# EAGLE board ESLv2 (EAGLE 9.6.2)
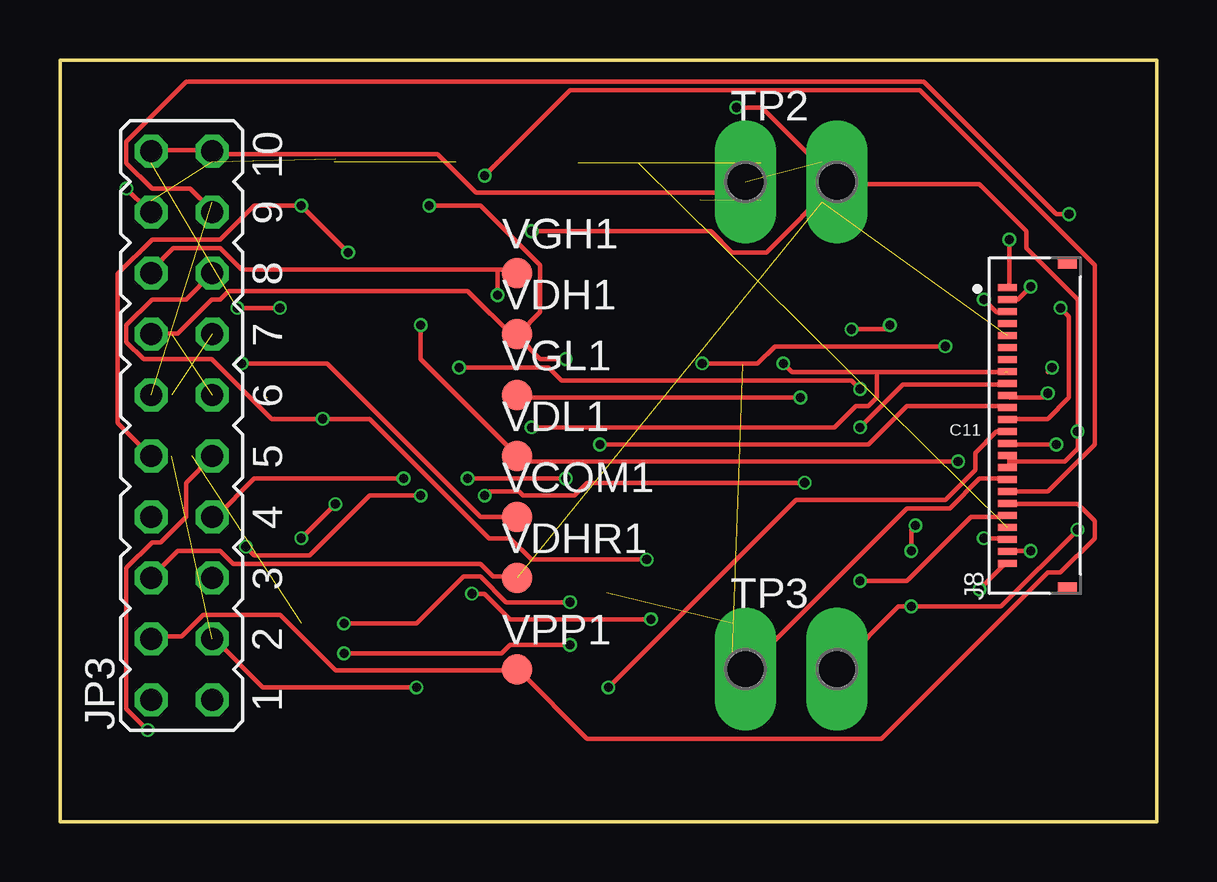
[diagram p0: board, top side]
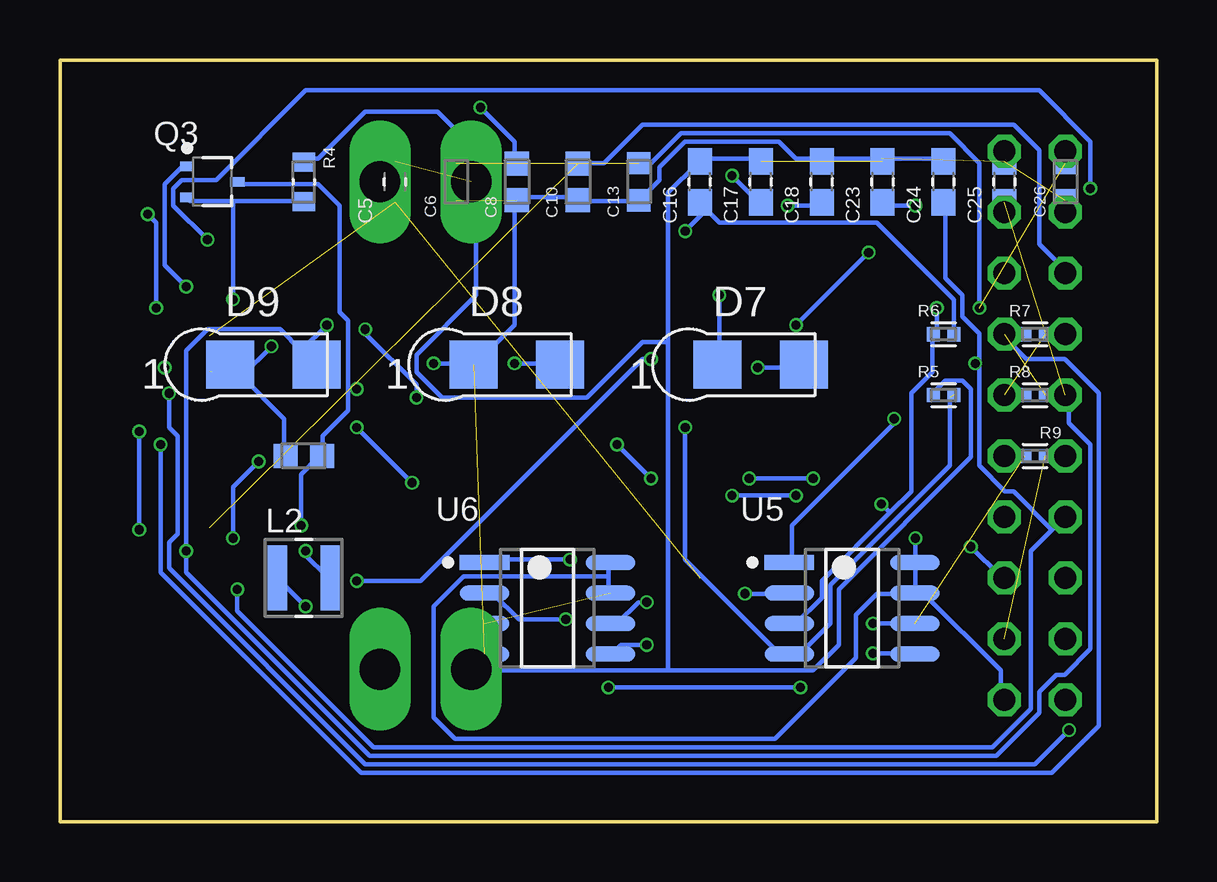
[diagram p1: board, bottom side, seen from below]

Size 45.72 x 31.75 mm. Coordinates in mm from the lower left corner, seen from the top.
Outline: 0,0 0,31.75 45.72,31.75 45.72,0 0,0
Copper layers (1*16): Top 0.035mm / dielectric 1.5mm / Bottom 0.035mm
Design rules "EagleRules-2-Layer-Shep-C": minimum track width 6mil, minimum drill 0.3mm, track to track 6mil, track to pad 6mil, pad to pad 6mil, via to via 6mil, smd to smd 0mil, copper to edge 10mil, drill to drill 10mil, minimum pad ring 2mil, minimum via ring 2mil, stop-mask expansion 2mil, vias tented up to drill 100mil, thermal gap 10mil
Net classes: 1 power: width 0.203 mm

## Footprints (pad centres in the part's own frame; a part is rotated, then mirrored left to right if it is on the bottom)
CAPC1608X90 = smd 1.1 x 1: 1 -0.85,0; 2 0.85,0
CAPC1608X90N = smd 0.92 x 0.98: 1 -0.775,0; 2 0.775,0
CAPC1608X100N = smd 1 x 1.02: 1 -0.759,0; 2 0.759,0
SOD-123FL = smd 2 x 2: 1 -1.8,0; 2 1.8,0
FPC-CONNECTOR-24PIN_HRS_FH34SRJ-24S-0.5SH(99) = smd 0.3 x 0.8: 1 5.75,1.15; 2 5.25,1.15; 3 4.75,1.15; 4 4.25,1.15; 5 3.75,1.15; 6 3.25,1.15; 7 2.75,1.15; 8 2.25,1.15; 9 1.75,1.15; 10 1.25,1.15; 11 0.75,1.15; 12 0.25,1.15; 13 -0.25,1.15; 14 -0.75,1.15; 15 -1.25,1.15; 16 -1.75,1.15; 17 -2.25,1.15; 18 -2.75,1.15; 19 -3.25,1.15; 20 -3.75,1.15; 21 -4.25,1.15; 22 -4.75,1.15; 23 -5.25,1.15; 24 -5.75,1.15 | smd 0.4 x 0.8: S1 -6.75,-1.35; S2 6.75,-1.35
JP10Q = drill 0.914 octagon: 1 -11.43,-1.27; 2 -11.43,1.27; 3 -8.89,-1.27; 4 -8.89,1.27; 5 -6.35,-1.27; 6 -6.35,1.27; 7 -3.81,-1.27; 8 -3.81,1.27; 9 -1.27,-1.27; 10 -1.27,1.27; 11 1.27,-1.27; 12 1.27,1.27; 13 3.81,-1.27; 14 3.81,1.27; 15 6.35,-1.27; 16 6.35,1.27; 17 8.89,-1.27; 18 8.89,1.27; 19 11.43,-1.27; 20 11.43,1.27
MURATA_LQH3NPZ100MMEL_0 = smd 0.8 x 2.7: 1 -1.1,0; 2 1.1,0
ON_SEMICONDUCTOR_MCH3478-TL-H_0 = smd 0.6 x 0.4: 1 -1.05,0.65; 2 -1.05,-0.65; 3 1.05,0
RESC1608X55N = smd 0.79 x 0.93: 1 -0.82,0; 2 0.82,0
RESC1005X40 = smd 0.54 x 0.6: 1 -0.43,0; 2 0.43,0
P2-38-17 = drill 1.702 pad 2.121 long: TP-1 -1.905,0; TP-2 1.905,0
MACRONIX_MX25V8006EM1I-13G_0 = smd 2.065 x 0.626: 1 -2.621,1.905; 2 -2.621,0.635; 3 -2.621,-0.635; 4 -2.621,-1.905; 5 2.621,-1.905; 6 2.621,-0.635; 7 2.621,0.635; 8 2.621,1.905
B1,27 = smd 1.27 x 1.27: TP 0,0

## Placement (x,y rotation side)
C5  CC0603ZRY5V8BB105  [CAPC1608X90]  31.75,26.67 90 bottom
C6  06033G104ZAT2A  [CAPC1608X90N]  29.21,26.67 90 bottom
C8  GRM188C81E475KE11D  [CAPC1608X100N]  26.67,26.67 90 bottom
C10  GRM188C81E475KE11D  [CAPC1608X100N]  24.13,26.67 90 bottom
C11  GRM188C81E475KE11D  [CAPC1608X100N]  35.56,15.24 0 bottom
C13  06033G104ZAT2A  [CAPC1608X90N]  21.59,26.67 90 bottom
C16  CC0603ZRY5V8BB105  [CAPC1608X90]  19.05,26.67 90 bottom
C17  CC0603ZRY5V8BB105  [CAPC1608X90]  16.51,26.67 90 bottom
C18  CC0603ZRY5V8BB105  [CAPC1608X90]  13.97,26.67 90 bottom
C23  CC0603ZRY5V8BB105  [CAPC1608X90]  11.43,26.67 90 bottom
C24  CC0603ZRY5V8BB105  [CAPC1608X90]  8.89,26.67 90 bottom
C25  CC0603ZRY5V8BB105  [CAPC1608X90]  6.35,26.67 90 bottom
C26  06033G104ZAT2A  [CAPC1608X90N]  3.81,26.67 90 bottom
D7  SS2040FL  [SOD-123FL]  16.51,19.05 0 bottom
D8  SS2040FL  [SOD-123FL]  26.67,19.05 0 bottom
D9  SS2040FL  [SOD-123FL]  36.83,19.05 0 bottom
J8  FPC-CONNECTOR-24PIN_FH34SRJ-24S-0.5SH(99)  [FPC-CONNECTOR-24PIN_HRS_FH34SRJ-24S-0.5SH(99)]  40.64,16.51 90 top
JP3  [JP10Q]  5.08,16.51 90 top
L2  MURATA_LQH3NPZ100MMELMURATA_LQH3NPZ100MMEL_0_0  [MURATA_LQH3NPZ100MMEL_0]  35.56,10.16 0 bottom
Q3  ON_SEMICONDUCTOR_MCH3478-TL-HON_SEMICONDUCTOR_MCH3478-TL-H_0_0  [ON_SEMICONDUCTOR_MCH3478-TL-H_0]  39.37,26.67 0 bottom
R4  RL0603FR-070R47L  [RESC1608X55N]  35.56,26.67 270 bottom
R5  RMCF0402ZT0R00  [RESC1005X40]  8.89,17.78 0 bottom
R6  RMCF0402ZT0R00  [RESC1005X40]  8.89,20.32 0 bottom
R7  RMCF0402ZT0R00  [RESC1005X40]  5.08,20.32 0 bottom
R8  RMCF0402ZT0R00  [RESC1005X40]  5.08,17.78 0 bottom
R9  RMCF0402ZT0R00  [RESC1005X40]  5.08,15.24 0 bottom
TP2  PTR2  [P2-38-17]  30.48,26.67 0 top
TP3  PTR2  [P2-38-17]  30.48,6.35 0 top
U5  MACRONIX_MX25V8006EM1I-13GMACRONIX_MX25V8006EM1I-13G_0_0  [MACRONIX_MX25V8006EM1I-13G_0]  12.7,8.89 0 bottom
U6  MACRONIX_MX25V8006EM1I-13GMACRONIX_MX25V8006EM1I-13G_0_0  [MACRONIX_MX25V8006EM1I-13G_0]  25.4,8.89 0 bottom
VCOM1  TPB1,27  [B1,27]  19.05,12.7 0 top
VDH1  TPB1,27  [B1,27]  19.05,20.32 0 top
VDHR1  TPB1,27  [B1,27]  19.05,10.16 0 top
VDL1  TPB1,27  [B1,27]  19.05,15.24 0 top
VGH1  TPB1,27  [B1,27]  19.05,22.86 0 top
VGL1  TPB1,27  [B1,27]  19.05,17.78 0 top
VPP1  TPB1,27  [B1,27]  19.05,6.35 0 top

## Library data of the parts
C5 C16-C18 C23-C25 = CAP 1uF; DESCRIPTION: 1µF -20%, +80% 25V Ceramic Capacitor Y5V (F) 0603 (1608 Metric); DIGI-KEY_PART_NUMBER: 311-1829-1-ND; MF: Yageo; MP: CC0603ZRY5V8BB105; PACKAGE: 0603 Yageo; PURCHASE-URL: https://pricing.snapeda.com/search/part/CC0603ZRY5V8BB105/?ref=eda
C6 C13 C26 = CAP 100nF; DESCRIPTION: Cap Ceramic 0.1uF 25V Y5V -20% to 80% Pad SMD 0603 85°C T/R; MF: AVX; MP: 06033G104ZAT2A; PACKAGE: None; PURCHASE-URL: https://pricing.snapeda.com/search/part/06033G104ZAT2A/?ref=eda
C8 C10 C11 = CAP 4.7uF; AVAILABILITY: In Stock; DESCRIPTION: SMD Capacitor X6S(EIA) with Capacitance: 4.7uF Tol. 10%. Rated Voltage: 25Vdc; MF: Murata; MP: GRM188C81E475KE11D; PACKAGE: 1608 Murata; PRICE: None; PURCHASE-URL: https://pricing.snapeda.com/search/part/GRM188C81E475KE11D/?ref=eda
D7-D9 = DIODE; AVAILABILITY: In Stock; DESCRIPTION: Schottky Diodes & Rectifiers GP/TR/13/RoHS/10K/SOD-123FL/SKY/SOD/SSM-20AAFL/SSM20FL-QI02/PJ///; MF: Panjit; MP: SS2040FL; PACKAGE: None; PRICE: None; PURCHASE-URL: https://pricing.snapeda.com/search/part/SS2040FL/?ref=eda
J8 = ESL; AVAILABILITY: In Stock; DESCRIPTION: 24 Position FFC, FPC Connector Contacts, Top and Bottom 0.020 (0.50mm) Surface Mount, Right Angle; MF: Hirose Electric; MP: FH34SRJ-24S-0.5SH(99); PACKAGE: None; PRICE: None; PURCHASE-URL: https://pricing.snapeda.com/search/part/FH34SRJ-24S-0.5SH(99)/?ref=eda
JP3 = jumper
L2 = IND 10uH; AMBIENT_TEMPERATURE_RANGE_HIGH: +105°C; AMBIENT_TEMPERATURE_RANGE_LOW: -40°C; AUTOMOTIVE: Yes; AUTOMOTIVE_GRADE: Grade 1; CENTROID_NOT_SPECIFIED: No; COMPOSITION: Wirewound; CORE_MATERIAL: Ferrite; DATASHEET: https://www.murata.com/en-us/products/productdetail?partno=LQH3NPZ100MME%23; DEVICE_CLASS_L1: Passive Components; DEVICE_CLASS_L2: Inductors; DEVICE_CLASS_L3: Fixed Inductors; FOOTPRINT_VARIANT_NAME_0: Recommended_Land_Pattern; HEIGHT: 1.5mm; INDUCTANCE: 10uH; LEAD_FREE: Yes; MF: Murata; MFG_PACKAGE_IDENT: LQH3NPH_ME; MFG_PACKAGE_IDENT_COMPONENT_ID: a63315cd171c542c; MFG_PACKAGE_IDENT_DATE: 0; MFG_PACKAGE_IDENT_REV: 0; MPN: LQH3NPZ100MMEL; PACKAGE: 1212.0; PREFIX: L; RMS_CURRENT: 1280mA; ROHS: Yes; SATURATION_CURRENT: 810mA; SELF_RESONANT_FREQUENCY: 20MHz; SERIES_RESISTANCE: 0.228Ω; SHIELDING: true; TEMPERATURE_RANGE_HIGH: +125°C; TEMPERATURE_RANGE_LOW: -40°C; TEST_FREQUENCY: 1MHz; TOLERANCE: 0.2; VERIFICATION_VERSION: 0.0.0.3
Q3 = MOSFET; CHANNEL_POLARITY: N Channel; CIIVA_IDS: 837008; CISS_TYP_PF: 130; COMPONENT_LINK_1_DESCRIPTION: Manufacturer URL; COMPONENT_LINK_1_URL: http://www.onsemi.com/; COMPONENT_LINK_3_DESCRIPTION: Package Specification; COMPONENT_LINK_3_URL: http://www.onsemi.com/pub_link/Collateral/EN7354-D.PDF; CONFIGURATION: Single; COSS_TYP_PF: 21; CRSS_TYP_PF: 14; DATASHEET: http://www.onsemi.cn/pub_link/Collateral/ENAA1353-D.PDF; FOOTPRINT_VARIANT_NAME_0: Manufacturer Recommended; IMPORTED: yes; IMPORTED_FROM: vault; IMPORT_TS: 1521851194; MF: On Semiconductor; MOUNTING_TECHNOLOGY: Surface Mount; MPN: MCH3478-TL-H; PACKAGE: MCPH-3; PACKAGE_DESCRIPTION: 3-Pin Small Outline Transistor, Body 2 x 1.6 mm, Pitch 0.65 mm; PACKAGE_TYPE: SC-70FL / MCPH-3; PACKING: Tape and Reel; PREFIX: Q; RELEASE_DATE: 1407149804; ROHS: No; VAULT_GUID: 93CF8D5F-116E-4A84-9C4D-567819B75567; VAULT_REVISION: 4F433114-B412-42D1-93FA-4D10C81BF666; VBRDSS_MIN_V: 30; VGSTH_MAX_V: 1.3; VGS_MAX_V: 12
R4 = RES .47ohm; AVAILABILITY: In Stock; DESCRIPTION: 470 mOhms ±1% 0.1W, 1/10W Chip Resistor 0603 (1608 Metric) Automotive AEC-Q200, Current Sense, Moisture Resistant Thick Film; MF: Yageo; MP: RL0603FR-070R47L; PACKAGE: 1608 Yageo; PRICE: None; PURCHASE-URL: https://pricing.snapeda.com/search/part/RL0603FR-070R47L/?ref=eda
R5-R9 = RMCF0402ZT0R00; AVAILABILITY: In Stock; DESCRIPTION: 0 Ohms Jumper 0.063W, 1/16W Chip Resistor 0402 (1005 Metric) Automotive AEC-Q200 Thick Film; MF: Stackpole Electronics; MP: RMCF0402ZT0R00; PACKAGE: 0402 Stackpole Electronics; PRICE: None; PURCHASE-URL: https://pricing.snapeda.com/search/part/RMCF0402ZT0R00/?ref=eda
TP2 TP3 VCOM1 VDH1 VDHR1 VDL1 VGH1 VGL1 VPP1 = testpad
U5 U6 = Flash Memory; 3DS_PART_NUMBER: 521-00003; ACCESS_TIME: 9us; AMBIENT_TEMPERATURE_RANGE_HIGH: +85°C; AMBIENT_TEMPERATURE_RANGE_LOW: -40°C; CENTROID_NOT_SPECIFIED: No; DATASHEET: https://media.digikey.com/pdf/Data%20Sheets/Macronix/MX25V8006E.pdf; DEVICE_CLASS_L1: Integrated Circuits (ICs); DEVICE_CLASS_L2: Memory; DEVICE_CLASS_L3: Flash; DIGIKEY_DESCRIPTION: IC FLASH 8MBIT 75MHZ 8SOP; DIGIKEY_PART_NUMBER: 1092-1118-ND; FOOTPRINT_PARAMETERS_0: {"fp_type":"SOIC_mini","params":{"N":{"nom":8,"long name":"Number of leads","min":null,"max":null,"short name":"N","type":"count"},"A":{"nom":false,"long name":"Height","min":false,"max":1750000,"short name":"A","type":"measurement"},"A1":{"nom":150000,"long name":"Package clearance","min":100000,"max":200000,"short name":"A1","type":"measurement"},"A2":{"nom":1450000,"long name":"Package height","min":1350000,"max":1550000,"short name":"A2","type":"measurement"},"D":{"nom":4900000,"long name":"Package length","min":4770000,"max":5030000,"short name":"D","type":"measurement"},"E":{"nom":5990000,"long name":"Width w/ leads","min":5800000,"max":6200000,"short name":"E","type":"measurement"},"E1":{"nom":3900000,"long name":"Package width","min":3800000,"max":4000000,"short name":"E1","type":"measurement"},"B":{"nom":410000,"long name":"Lead width","min":360000,"max":510000,"short name":"B","type":"measurement"},"C":{"nom":200000,"long name":"Lead thickness","min":150000,"max":250000,"short name":"C","type":"measurement"},"e":{"nom":1270000,"long name":"Lead pitch","min":null,"max":null,"short name":"e","type":"measurement"},"L":{"nom":660000,"long name":"Lead foot length","min":460000,"max":860000,"short name":"L","type":"measurement"},"PHI":{"nom":5,"long name":"Lead foot angle","min":0,"max":8,"short name":"PHI","type":"measurement"},"HT":{"default":"No","long name":"Thermal pad","type":"multichoiceparent","short name":"HT","children":[]},"offset x":{"nom":0,"long name":"X Center offset","min":null,"max":null,"short name":"offset x","type":"measurement"},"offset y":{"nom":0,"long name":"Y Center offset","min":null,"max":null,"short name":"offset y","type":"measurement"},"LS":{"default":"Rounded rectangle","long name":"Land shape","type":"multichoice","short name":"LS"},"LS1":{"default":"Rectangle","long name":"Land shape (Pin 1)","type":"multichoice","short name":"LS1"},"solder toe":{"nom":550000,"long name":"Solder fillet (toe)","min":null,"max":null,"short name":"solder toe","type":"fixedmeasurement"},"solder heel":{"nom":450000,"long name":"Solder fillet (heel)","min":null,"max":null,"short name":"solder heel","type":"fixedmeasurement"},"solder side":{"nom":50000,"long name":"Solder fillet (side)","min":null,"max":null,"short name":"solder side","type":"fixedmeasurement"},"courtyard":{"nom":500000,"long name":"Courtyard","min":null,"max":null,"short name":"courtyard","type":"fixedmeasurement"},"SF":{"default":"A","long name":"Packing level","type":"multichoiceparent","short name":"SF","help":"http://support.upverter.com/customer/portal/articles/978783-what-is-a-footprint-packing-level","children":["solder toe","solder heel","solder side","courtyard"]}}}; FOOTPRINT_PARAMETERS_1: {"fp_type":"SOIC_mini","params":{"N":{"nom":8,"long name":"Number of leads","min":null,"max":null,"short name":"N","type":"count"},"A":{"nom":false,"long name":"Height","min":false,"max":1750000,"short name":"A","type":"measurement"},"A1":{"nom":150000,"long name":"Package clearance","min":100000,"max":200000,"short name":"A1","type":"measurement"},"A2":{"nom":1450000,"long name":"Package height","min":1350000,"max":1550000,"short name":"A2","type":"measurement"},"D":{"nom":4900000,"long name":"Package length","min":4770000,"max":5030000,"short name":"D","type":"measurement"},"E":{"nom":5990000,"long name":"Width w/ leads","min":5800000,"max":6200000,"short name":"E","type":"measurement"},"E1":{"nom":3900000,"long name":"Package width","min":3800000,"max":4000000,"short name":"E1","type":"measurement"},"B":{"nom":410000,"long name":"Lead width","min":360000,"max":510000,"short name":"B","type":"measurement"},"C":{"nom":200000,"long name":"Lead thickness","min":150000,"max":250000,"short name":"C","type":"measurement"},"e":{"nom":1270000,"long name":"Lead pitch","min":null,"max":null,"short name":"e","type":"measurement"},"L":{"nom":660000,"long name":"Lead foot length","min":460000,"max":860000,"short name":"L","type":"measurement"},"PHI":{"nom":5,"long name":"Lead foot angle","min":0,"max":8,"short name":"PHI","type":"measurement"},"HT":{"default":"No","long name":"Thermal pad","type":"multichoiceparent","short name":"HT","children":[]},"offset x":{"nom":0,"long name":"X Center offset","min":null,"max":null,"short name":"offset x","type":"measurement"},"offset y":{"nom":0,"long name":"Y Center offset","min":null,"max":null,"short name":"offset y","type":"measurement"},"LS":{"default":"Rounded rectangle","long name":"Land shape","type":"multichoice","short name":"LS"},"LS1":{"default":"Rectangle","long name":"Land shape (Pin 1)","type":"multichoice","short name":"LS1"},"solder toe":{"nom":350000,"long name":"Solder fillet (toe)","min":null,"max":null,"short name":"solder toe","type":"fixedmeasurement"},"solder heel":{"nom":350000,"long name":"Solder fillet (heel)","min":null,"max":null,"short name":"solder heel","type":"fixedmeasurement"},"solder side":{"nom":30000,"long name":"Solder fillet (side)","min":null,"max":null,"short name":"solder side","type":"fixedmeasurement"},"courtyard":{"nom":250000,"long name":"Courtyard","min":null,"max":null,"short name":"courtyard","type":"fixedmeasurement"},"SF":{"default":"B","long name":"Packing level","type":"multichoiceparent","short name":"SF","help":"http://support.upverter.com/customer/portal/articles/978783-what-is-a-footprint-packing-level","children":["solder toe","solder heel","solder side","courtyard"]}}}; FOOTPRINT_PARAMETERS_2: {"fp_type":"SOIC_mini","params":{"N":{"nom":8,"long name":"Number of leads","min":null,"max":null,"short name":"N","type":"count"},"A":{"nom":false,"long name":"Height","min":false,"max":1750000,"short name":"A","type":"measurement"},"A1":{"nom":150000,"long name":"Package clearance","min":100000,"max":200000,"short name":"A1","type":"measurement"},"A2":{"nom":1450000,"long name":"Package height","min":1350000,"max":1550000,"short name":"A2","type":"measurement"},"D":{"nom":4900000,"long name":"Package length","min":4770000,"max":5030000,"short name":"D","type":"measurement"},"E":{"nom":5990000,"long name":"Width w/ leads","min":5800000,"max":6200000,"short name":"E","type":"measurement"},"E1":{"nom":3900000,"long name":"Package width","min":3800000,"max":4000000,"short name":"E1","type":"measurement"},"B":{"nom":410000,"long name":"Lead width","min":360000,"max":510000,"short name":"B","type":"measurement"},"C":{"nom":200000,"long name":"Lead thickness","min":150000,"max":250000,"short name":"C","type":"measurement"},"e":{"nom":1270000,"long name":"Lead pitch","min":null,"max":null,"short name":"e","type":"measurement"},"L":{"nom":660000,"long name":"Lead foot length","min":460000,"max":860000,"short name":"L","type":"measurement"},"PHI":{"nom":5,"long name":"Lead foot angle","min":0,"max":8,"short name":"PHI","type":"measurement"},"HT":{"default":"No","long name":"Thermal pad","type":"multichoiceparent","short name":"HT","children":[]},"offset x":{"nom":0,"long name":"X Center offset","min":null,"max":null,"short name":"offset x","type":"measurement"},"offset y":{"nom":0,"long name":"Y Center offset","min":null,"max":null,"short name":"offset y","type":"measurement"},"LS":{"default":"Rounded rectangle","long name":"Land shape","type":"multichoice","short name":"LS"},"LS1":{"default":"Rectangle","long name":"Land shape (Pin 1)","type":"multichoice","short name":"LS1"},"solder toe":{"nom":150000,"long name":"Solder fillet (toe)","min":null,"max":null,"short name":"solder toe","type":"fixedmeasurement"},"solder heel":{"nom":250000,"long name":"Solder fillet (heel)","min":null,"max":null,"short name":"solder heel","type":"fixedmeasurement"},"solder side":{"nom":10000,"long name":"Solder fillet (side)","min":null,"max":null,"short name":"solder side","type":"fixedmeasurement"},"courtyard":{"nom":100000,"long name":"Courtyard","min":null,"max":null,"short name":"courtyard","type":"fixedmeasurement"},"SF":{"default":"C","long name":"Packing level","type":"multichoiceparent","short name":"SF","help":"http://support.upverter.com/customer/portal/articles/978783-what-is-a-footprint-packing-level","children":["solder toe","solder heel","solder side","courtyard"]}}}; FOOTPRINT_URL: http://www.macronix.com/Lists/ApplicationNote/Attachments/1897/AN0239V1%20-%20Macronix%20150mil%208SOP_6x5mm8WSON_dual%20layout.pdf; FOOTPRINT_VARIANT_NAME_0: IPC_A; FOOTPRINT_VARIANT_NAME_1: IPC_B; FOOTPRINT_VARIANT_NAME_2: IPC_C; FOOTPRINT_VARIANT_NAME_3: Recommended_Land_Pattern; FREQUENCY: 75MHz; HEIGHT: 1.75mm; INTERFACE: SPI; IPC_LAND_PATTERN_NAME: SOIC127P599X175-8; LEAD_FREE: yes; MAX_SUPPLY_VOLTAGE: 3.6V; MEMORY_SIZE: 8MB; MEMORY_TYPE: FLASH; MF: Macronix; MFG_PACKAGE_IDENT: SOP-8; MFG_PACKAGE_IDENT_DATE: 11-26-03; MFG_PACKAGE_IDENT_REV: 6; MIN_SUPPLY_VOLTAGE: 2.35V; MPN: MX25V8006EM1I-13G; NOMINAL_SUPPLY_CURRENT: 12mA; PACKAGE: SOP8; PREFIX: U; ROHS: yes; STANDOFF_HEIGHT: 0.15mm; TEMPERATURE_RANGE_HIGH: +85°C; TEMPERATURE_RANGE_LOW: -40°C

## Nets
BS2: C6.1 C8.1 C10.1 C13.1 C25.2 C26.1 D8.1 J8.8 R5.2 U5.4 U6.4
BUSY_COG: J8.9 JP3.5
D/C_COG: J8.11 JP3.7
EPD_CS_M_COG: J8.12 JP3.17
EPD_CS_S_COG: J8.1 JP3.18
FLASH_CS_M: JP3.15 U5.1 U6.1
FLASH_CS_S: JP3.2
FLASH_MISO: U5.2 U6.2
FLASH_MOSI: U5.5 U6.5
FLASH_SCLK: R9.1 U5.6 U6.6
FLASH_SI: R8.1
FLASH_SO: R7.1
GDR: J8.2 Q3.1
GND: C5.2 C16.2 C17.2 C18.2 C23.2 C24.2 J8.17 JP3.19 JP3.20 R4.1 R5.1 TP2.TP-1 TP3.TP-1
N$1: C11.2 D7.2 L2.2 Q3.3
N$15: C11.1 D8.2 D9.1
RESE: J8.3 Q3.2 R4.2
RESET_COG: J8.10 JP3.9
SPI_CLK_COG: J8.13 JP3.3 R9.2
SPI_MISO_COG: JP3.11 R7.2
SPI_MOSI_COG: J8.14 JP3.13 R8.2
VCC: C8.2 C16.1 J8.15 J8.16 L2.1 R6.2 TP2.TP-2 TP3.TP-2
VCC_3V3: C6.2 C13.2 C26.2 JP3.1 R6.1 U5.3 U5.7 U5.8 U6.3 U6.7 U6.8
VCOM: C24.1 J8.24 JP3.8 VCOM1.TP
VDDD: C17.1 J8.18
VDH: C18.1 J8.20 JP3.14 VDH1.TP
VDHR: C5.1 J8.5 JP3.6 VDHR1.TP
VDL: C23.1 J8.22 JP3.10 VDL1.TP
VGH: C10.2 D7.1 J8.21 JP3.16 VGH1.TP
VGL: C25.1 D9.2 J8.23 JP3.12 VGL1.TP
VPP: J8.19 JP3.4 VPP1.TP

## Tracks (layer width: path | path; a pad name or v marks a point on that pad's centre or on a via)
BS2  (via drill 0.38)  (6 unrouted)
  Top 0.178: 34.06,18.74 30.5,18.74 v30.15,19.1 | 34.06,18.74 39.4,18.74 | v19.66,16.43 32.28,16.43 33.17,17.32 33.71,17.32 34.06,17.68 34.06,18.74
  Bottom 0.178: 8.64,17.68 8.64,14.83 13.61,9.86 13.61,8.25 14.86,7.01 15.21,7.01 U5.4 15.39,7.01 15.75,7.01 19.66,10.92 v19.66,16.43 | 11.48,27.63 13.97,27.63 15.04,27.63 15.75,28.35 19.66,28.35 20.73,27.28 20.73,26.75 21.44,26.04 C13.1 21.61,25.86 24.11,25.86 C10.1 24.28,26.04 26.59,26.04 C8.1 26.77,25.86 26.77,20.7 28.37,19.1 D8.1 28.55,19.1 v30.15,19.1
BUSY_COG  (via drill 0.38)
  Top 0.178: v33.35,16.43 35.13,18.21 39.4,18.21 J8.9 | v31.04,14.12 21.97,14.12 21.44,13.59 19.3,13.59 19.13,13.77 17.88,13.77 v17.7,13.59 | v15.04,13.59 12.9,13.59 10.41,11.1 8.1,11.1 v7.75,11.45
  Bottom 0.178: v31.04,14.12 v33.35,16.43 | v15.04,13.59 v17.7,13.59 | v7.75,11.45 6.5,10.21 JP3.5
D/C_COG  (via drill 0.38)
  Top 0.178: v22.5,15.72 33.71,15.72 35.31,17.32 39.4,17.32 J8.11 | v16.99,14.3 v21.08,14.3 | v14.33,14.3 8.1,14.3 6.5,12.7 JP3.7
  Bottom 0.178: v21.08,14.3 v22.5,15.72 | v14.33,14.3 v16.99,14.3
EPD_CS_M_COG  (via drill 0.38)
  Top 0.178: v41.71,21.41 42.06,21.06 42.06,17.68 41.17,16.79 39.57,16.79 J8.12 | v42.06,25.32 41.53,25.32 36.02,30.84 5.26,30.84 2.77,28.35 2.77,27.46 3.83,26.39 5.44,26.39 6.33,25.5 JP3.17
  Bottom 0.178: v41.71,21.41 41.71,24.97 v42.06,25.32
EPD_CS_S_COG  (via drill 0.38)
  Top 0.178: v39.57,24.26 39.57,22.3 J8.1 | v2.77,26.39 3.66,25.5 JP3.18
  Bottom 0.178: v39.57,24.26 41,25.68 41,26.39 40.64,26.75 39.22,26.75 35.48,30.48 4.9,30.48 2.77,28.35 v2.77,26.39
FLASH_CS_M  (via drill 0.38)
  Top 0.178: JP3.15 5.26,21.77 3.83,21.77 2.77,20.7 2.77,19.99 3.48,19.28 6.33,19.28 8.81,16.79 v10.95,16.79 12.9,16.79 17.88,11.81 18.77,11.81 19.66,10.92 v24.46,10.92
  Bottom 0.178: v10.95,16.79 10.95,16.61 15.21,12.34 15.21,10.92 U5.1 | v24.46,10.92 28.02,10.92 U6.1
FLASH_MISO  (via drill 0.38)
  Top 0.178: v17.17,9.5 17.7,9.5 18.77,8.43 v24.64,8.43
  Bottom 0.178: v17.17,9.5 15.39,9.5 U5.2 | v24.64,8.43 26.59,8.43 27.66,9.5 28.02,9.5 U6.2
FLASH_MOSI  (via drill 0.38)
  Top 0.178: v11.84,7.01 18.41,7.01 18.77,7.37 v21.26,7.37
  Bottom 0.178: v11.84,7.01 10.24,7.01 U5.5 | v21.26,7.37 22.33,7.37 22.68,7.01 U6.5
FLASH_SCLK  (via drill 0.38)  (1 unrouted)
  Top 0.178: v11.84,8.25 14.86,8.25 16.82,10.21 17.53,10.21 18.59,9.14 v21.26,9.14
  Bottom 0.178: v11.84,8.25 U5.6 | v21.26,9.14 21.61,9.14 22.5,8.25 U6.6
GDR  (via drill 0.38)
  Top 0.178: v40.46,22.3 39.93,21.77 39.57,21.77 J8.2
  Bottom 0.178: v40.46,22.3 41.35,23.19 41.35,26.57 40.64,27.28 40.46,27.28 Q3.1
GND  (3 unrouted)
  Top 0.178: JP3.20 3.83,27.99 6.33,27.99 JP3.19 6.5,27.81 15.75,27.81 17.35,26.21 28.19,26.21 28.55,26.57 TP2.TP-1 | J8.17 39.4,14.3 38.33,14.3 37.08,13.06 35.31,13.06 28.73,6.48 TP3.TP-1
  Bottom 0.178: R4.1 35.48,27.63 34.95,27.63 32.99,29.59 29.97,29.59 28.37,27.99 28.37,26.92 28.55,26.75 TP2.TP-1 28.55,26.57 28.37,26.39 28.37,21.95 30.86,19.46 30.86,18.74 29.79,17.68 23.75,17.68 21.44,19.99 20.37,19.99 | C17.2 16.64,27.63 18.95,27.63 C16.2 19.13,27.46 20.37,26.21 20.37,19.99 | 20.37,6.3 28.55,6.3 TP3.TP-1 | 20.37,6.3 14.33,6.3 13.26,7.37 13.26,9.68 7.75,15.19 7.75,18.03 8.1,18.39 8.81,18.39 9.17,18.03 9.17,17.86 R5.1 | 20.37,6.3 20.37,19.99 | C24.2 8.99,27.63 11.3,27.63 C23.2
N$1  (via drill 0.38)
  Top 0.178: v16.64,18.92 20.37,18.92 20.9,18.39 32.99,18.39 v33.35,18.03 | v35.48,11.28 35.48,12.17 v35.66,12.34
  Bottom 0.178: 33.71,18.03 33.71,17.14 34.77,16.08 34.77,15.37 C11.2 34.95,15.19 35.66,14.48 v35.66,12.34 | 33.71,18.03 33.71,20.88 34.06,21.23 34.06,25.68 34.95,26.57 38.15,26.57 Q3.3 | v16.64,18.92 14.86,18.92 D7.2 | 33.71,18.03 v33.35,18.03 | v35.48,11.28 35.48,11.1 34.59,10.21 L2.2
N$15  (via drill 0.38)
  Top 0.178: v26.77,19.1 29.08,19.1 29.79,19.81 v36.91,19.81
  Bottom 0.178: 38.15,18.57 38.51,18.92 D9.1 38.15,18.57 | 38.15,18.57 36.37,16.79 36.37,15.37 C11.1 | v26.77,19.1 24.99,19.1 D8.2 | 38.15,18.57 v36.91,19.81
N$18  (via drill 0.38)
  Top 0.178: v41.35,18.92 41.17,18.74
RESE  (via drill 0.38)
  Top 0.178: v38.51,21.77 39.04,21.23 39.4,21.23 J8.3
  Bottom 0.178: 38.51,25.86 35.66,25.86 R4.2 | 38.51,25.86 40.28,25.86 Q3.2 | 38.51,25.86 v38.51,21.77
RESET_COG  (via drill 0.38)
  Top 0.178: v41.17,17.86 41,17.68 39.57,17.68 J8.10 | v3.66,3.81 2.77,4.7 2.77,10.57 3.83,11.63 4.19,11.63 5.26,12.7 5.26,14.12 6.33,15.19 JP3.9
  Bottom 0.178: v41.17,17.86 41.17,16.43 40.82,16.08 40.82,11.99 41.17,11.63 41.17,10.57 32.99,2.39 5.08,2.39 v3.66,3.81
SPI_CLK_COG  (via drill 0.38)  (1 unrouted)
  Top 0.178: v22.86,5.59 30.68,13.41 36.91,13.41 38.15,14.66 38.15,15.37 39.04,16.26 39.4,16.26 J8.13 | v14.86,5.59 8.46,5.59 6.5,7.54 JP3.3
  Bottom 0.178: v14.86,5.59 v22.86,5.59
SPI_MISO_COG  (1 unrouted)
SPI_MOSI_COG  (via drill 0.38)  (1 unrouted)
  Top 0.178: v41.53,15.72 39.57,15.72 J8.14
  Bottom 0.178: v41.53,15.72 41.53,10.39 33.17,2.03 4.37,2.03 2.41,3.99 2.41,17.86 3.83,19.28 5.44,19.28 6.33,20.17 JP3.13
VCC  (via drill 0.38)
  Top 0.178: TP3.TP-2 32.46,6.48 34.95,8.97 v35.48,8.97 39.22,8.97 v42.42,12.17 | 39.57,15.01 39.57,15.19 J8.15 | 39.57,15.01 39.57,14.83 J8.16 | 39.57,15.01 41.88,15.01 42.42,15.55 v42.42,16.26 42.42,21.77 40.28,23.9 40.28,24.61 38.33,26.57 32.46,26.57 TP2.TP-2 | v28.19,29.77 29.26,29.77 32.28,26.75 TP2.TP-2 | v19.66,24.61 27.13,24.61 28.02,23.72 29.44,23.72 TP2.TP-2
  Bottom 0.178: v35.48,8.97 36.55,10.03 L2.1 | 18.77,25.5 18.95,25.68 C16.1 18.77,25.5 | 18.77,25.5 18.24,24.97 11.66,24.97 8.46,21.77 8.46,20.34 R6.2 | v28.19,29.77 26.77,28.35 26.77,27.46 C8.2 | v19.66,24.61 18.77,25.5 | v42.42,16.26 v42.42,12.17
VCC_3V3  (via drill 0.38)  (3 unrouted)
  Top 0.178: v9.17,21.41 v7.39,21.41 | v11.48,13.23 v10.06,11.81
  Bottom 0.178: 22.86,10.21 22.86,10.74 U6.8 | 22.86,10.21 22.86,9.68 U6.7 | U5.7 10.06,9.68 10.06,10.74 U5.8 10.06,10.92 v10.06,11.81 | U5.7 10.06,9.5 9.7,9.5 6.5,6.3 6.5,5.23 JP3.1 | 22.86,10.21 28.91,10.21 30.15,8.97 30.15,4.34 29.26,3.45 15.93,3.45 12.55,6.83 12.55,8.61 11.66,9.5 10.24,9.5 U5.7 | 11.12,12.88 13.97,10.03 13.97,9.32 15.04,8.25 U5.3 | 11.12,12.88 10.24,13.77 10.24,17.86 9.35,18.74 9.35,20.17 R6.1 9.17,20.34 v9.17,21.41 | v7.39,21.41 7.39,27.46 8.64,28.7 19.84,28.7 21.08,27.46 21.44,27.46 C13.2 | 11.12,12.88 v11.48,13.23
VCOM  (via drill 0.38)
  Top 0.178: v38.33,9.68 39.4,10.74 J8.24 | VCOM1.TP 17.53,12.7 11.12,19.1 v7.57,19.1
  Bottom 0.178: v38.33,9.68 38.33,8.79 32.64,3.1 6.86,3.1 5.26,4.7 5.26,11.28 4.37,12.17 | 4.37,12.17 3.83,12.7 JP3.8 | 7.39,19.1 7.39,14.83 6.33,13.77 5.97,13.77 4.37,12.17 | 7.39,19.1 7.39,20.34 8.1,21.06 8.1,21.95 8.81,22.66 8.81,25.68 C24.1 | 7.39,19.1 v7.57,19.1
VDDD  (via drill 0.38)
  Top 0.178: v17.7,26.92 21.26,30.48 35.84,30.48 43.13,23.19 43.13,15.72 41.17,13.77 39.57,13.77 J8.18
  Bottom 0.178: v17.7,26.92 16.64,25.86 C17.1
VDH  (via drill 0.38)
  Top 0.178: v33.35,10.03 35.31,10.03 37.97,12.7 39.4,12.7 J8.20 | v21.08,19.28 20.02,19.28 19.13,20.17 VDH1.TP | v15.39,25.68 17.53,25.68 20.02,23.19 20.02,21.23 19.13,20.34 VDH1.TP | JP3.14 3.83,20.34 4.9,20.34 6.33,21.77 6.68,21.77 7.04,22.12 16.99,22.12 18.95,20.17 VDH1.TP
  Bottom 0.178: v33.35,10.03 30.68,10.03 21.44,19.28 v21.08,19.28 | v15.39,25.68 13.97,25.68 C18.1
VDHR  (2 unrouted)
  Top 0.178: VDHR1.TP 18.95,10.21 18.06,10.21 17.53,10.74 7.21,10.74 6.68,11.28 4.9,11.28 3.83,10.21 JP3.6
VDL  (via drill 0.38)
  Top 0.178: JP3.10 3.66,15.37 2.41,16.61 2.41,22.84 3.83,24.26 6.68,24.26 8.1,25.68 v10.06,25.68 v12.01,23.72 | v38.51,11.81 39.4,11.81 J8.22 | v37.44,15.01 19.3,15.01 19.13,15.19 VDL1.TP 18.95,15.37 15.04,19.28 v15.04,20.7
  Bottom 0.178: v10.06,25.68 11.3,25.68 C23.1 | v38.51,11.81 38.51,13.95 v37.44,15.01 | v15.04,20.7 v12.01,23.72
VGH  (via drill 0.38)  (1 unrouted)
  Top 0.178: 18.24,23.01 7.57,23.01 6.68,23.9 4.72,23.9 3.83,23.01 JP3.16 | 18.24,23.01 18.95,23.01 VGH1.TP | 18.24,23.01 v18.24,21.95
  Bottom 0.178: C10.2 24.11,27.46 23.04,27.46 21.44,29.06 5.97,29.06 4.9,27.99 4.9,24.08 3.83,23.01 JP3.16 | v18.24,21.95 18.24,19.1 D7.1
VGL  (via drill 0.38)  (1 unrouted)
  Top 0.178: v40.46,11.28 39.57,11.28 J8.23 | v30.86,17.68 19.13,17.68 VGL1.TP | v32.99,20.52 34.42,20.52 v34.59,20.7
  Bottom 0.178: 35.66,19.63 35.13,19.1 D9.2 35.66,19.63 | 35.66,19.63 36.55,20.52 39.57,20.52 40.46,19.63 v40.46,11.28 40.46,10.39 32.82,2.74 6.68,2.74 4.9,4.52 4.9,5.41 4.19,6.12 3.83,6.12 2.77,7.19 2.77,15.72 3.66,16.61 3.66,17.68 JP3.12 | v30.86,17.68 30.86,18.21 32.99,20.34 v32.99,20.52 | 35.66,19.63 v34.59,20.7
VPP
  Top 0.178: J8.19 39.57,13.23 42.42,13.23 43.13,12.52 43.13,11.81 41.71,10.39 41.17,10.39 34.24,3.45 21.97,3.45 19.13,6.3 VPP1.TP 18.95,6.3 11.48,6.3 9.17,8.61 5.97,8.61 5.08,7.72 3.83,7.72 JP3.4

## Text on the board
Measures: Clears 4-40 Screw | All Dimensions in Inches